# Altium PCB RPI Adapter Board.PcbDoc
Units mm, origin at the board's own origin, x right, y up, seen from the top; angles counter-clockwise.
Board outline 15.01 x 16.01 mm, 2 copper layers (Top Layer, Bottom Layer); 2 components, 4 nets, 12 pads, 0 vias.
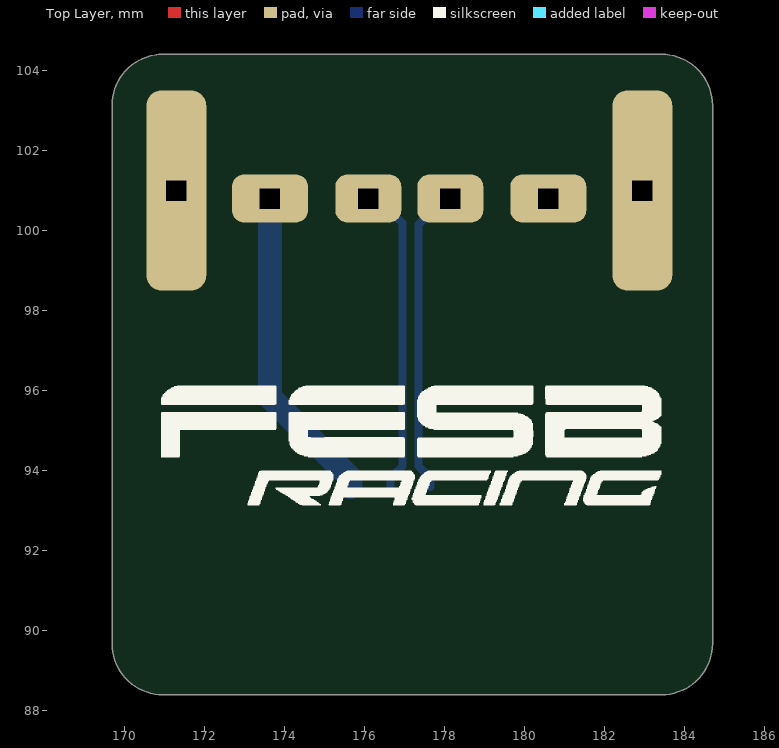
[diagram p0: Top Layer view]
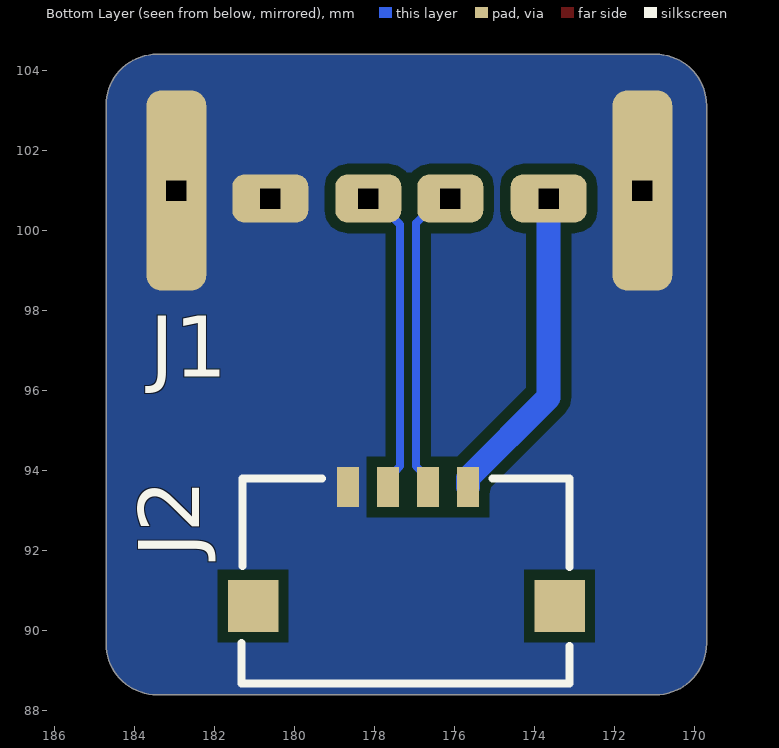
[diagram p1: Bottom Layer view, seen from below]

## Layer stack, top to bottom
Top Solder: solder mask 0.0102, Solder Resist, Dk 3.5
Top Layer: signal copper 0.0356
Dielectric 1: dielectric 0.32, FR-4, Dk 4.8
Bottom Layer: signal copper 0.0356
Bottom Solder: solder mask 0.0102, Solder Resist, Dk 3.5

## Board outline
169.695,89.67 ccw(c170.97,89.67) 170.97,88.395 183.43,88.395 ccw(c183.43,89.67) 184.705,89.67 184.705,103.13 ccw(c183.43,103.13) 183.43,104.405 170.97,104.405 ccw(c170.97,103.13) 169.695,103.13

## Design rules (kind name [scope] priority, off if disabled: settings)
Clearance [All] p1: gap=0.254 ignorepadtopadclearanceinfootprint=TRUE except(0.15: Arc-Arc Arc-Track Arc-Text Track-Track Track-Text SMDPad-SMDPad SMDPad-Text THPad-Text Via-Text Fill-Text Poly-Text Region-Text Text-Text; 0.2: Arc-SMDPad Track-SMDPad; 0.3: Arc-Hole Track-Hole SMDPad-Hole THPad-Hole Via-Hole Fill-Hole Poly-Hole Region-Hole Text-Hole; 0.33: Arc-THPad Track-THPad SMDPad-THPad; 0.5: THPad-THPad)
ComponentClearance [All] p1: gap=0 collisioncheckmode=3 verticalgap=0.254 showdistances=FALSE
DiffPairsRouting [All] p1: maxlimit=0.2 minlimit=0.2 mostfreqgap=0.2 toplayer_minwidth=0.2 toplayer_maxwidth=0.2 toplayer_prefwidth=0.2 bottomlayer_minwidth=0.2 bottomlayer_maxwidth=0.2 bottomlayer_prefwidth=0.2 maxuncoupledlength=12.7
HoleSize [All] p1: absolutevalues=TRUE maxlimit=6.3 minlimit=0.2 maxpercent=80.000 minpercent=20.000
MinimumAnnularRing [All] p1: minimumring=0.2
MinimumSolderMaskSliver [All] p1: minsoldermaskwidth=0
PlaneClearance [All] p1: clearance=0.3
PlaneConnect [All] p1: planeconnectstyle=Direct reliefexpansion=0.508 reliefentries=4 reliefconductorwidth=0.254 reliefairgap=0.254
PolygonConnect [All] p1: connectstyle=Direct reliefconductorwidth=0.254 reliefentries=4 polygonreliefangle="90 Angle" airgapwidth=0.254
RoutingVias [All] p1: holewidth=0.3 width=0.5 viastyle="Through Hole" minholewidth=0.2 minwidth=0.45 maxholewidth=1 maxwidth=0.6
SilkToSilkClearance [All] p1: silktosilkclearance=0.15
SilkToSolderMaskClearance [IsPad] p1: minsilkscreentomaskgap=0.1 clearancetoexposedcopper=TRUE
SolderMaskExpansion [All] p1: expansion=0.102 istentingtop=FALSE
Width [All] p1: maxlimit=10 minlimit=0.2 preferedwidth=0.254
22 further rules are at their usual default settings.

## Classes and differential pairs
differential pair USB: +USB_P -USB_N

## Components (designator, comment, footprint, x,y, rotation, side; value= is the part's Value field where it differs from the comment)
J1 "USB_A 2.0" USB_A_M_TH_V 177.1,101 r180 bottom
J2 "Molex Pico-Lock 1x4" 5037630491 176.544,92.1 r0 bottom

## Footprints (in the part's own frame and the unit in brackets; to place one, negate y for a bottom-side part, rotate by r counter-clockwise, add the part's x,y. Pads: shape width x height; smd on the part's side, far side on the other; paste and mask are expansions set on the pad)
5037630491 [mm]
  rect 0.55x1 smd: 1(-0.887,-1.49) 2(0.113,-1.49) 3(1.113,-1.49) 4(2.113,-1.49)
  rect 1.26x1.3 smd: 5(-3.175,1.49) 5(4.488,1.49)
  silkscreen extent -3.43,-1.7 4.78,3.43, body extent -4.06,-2.16 5.33,3.43, height 1.47
USB_A_M_TH_V [mm]
  rrect50% 1.9x1.2 hole 0.5 square: 1(3.46,-0.2) 4(-3.5,-0.2)
  rrect50% 1.65x1.2 hole 0.5 square: 2(1,-0.2) 3(-1.05,-0.2)
  rrect50% 1.5x5 hole 0.5 square: 5(-5.85,0) 5(5.8,0)
  body extent -7,-2.7 7,2.7, height 22.61

## Part data
J1: library part "Kandens USB_A 2.0", Manufacturer Part Number="AM 15.0", Supplier Part Number=Alibaba, ComponentLinkDescription=Datasheet, ComponentLinkURL=https://sc02.alicdn.com/kf/Hb5bc4045d1a641a4a6ab2afd0a44bb88U/246867406/Hb5bc4045d1a641a4a6ab2afd0a44bb88U.png_.webp, FR_SN=J-23, Part Number="Kandens USB_A 2.0"
J2: Manufacturer Part Number=503763-0491, Supplier Part Number=538-503763-0491, ComponentLinkDescription=Datasheet, ComponentLinkURL=https://hr.mouser.com/datasheet/2/276/2/5037630491_PCB_HEADERS-463683.pdf, FR_SN=J-21, Part Number="Molex Pico-Lock 1x4"

## Nets (pads, with @x,y where several pads share a name; then routed paths per layer and width w, separated by ;. In a path a pad name is that pad's centre, name@x,y a point inside that pad or via, vN(x,y) a via of type N, cw(c..) or ccw(c..) an arc to the next point about the centre after c; other vN are vias at no path point)
NetJ1_1: J1.1 J2.1 | length 8
  Bottom Layer w0.6: J1.1 173.64,95.831 175.656,93.815 J2.1
NetJ1_4: J1.4 J1.5 J2.4
USB_N: J1.2 J2.2 | length 7.7
  Bottom Layer w0.2: J1.2@176.2,100.8 176.339,100.8 176.956,100.183 176.956,94.107 176.839,93.99 176.831,93.99 176.656,93.815 J2.2
USB_P: J1.3 J2.3 | length 7.9
  Bottom Layer w0.2: J2.3 177.656,93.815 177.481,93.99 177.473,93.99 177.356,94.107 177.356,100.149 178.007,100.8 J1.3@178.25,100.8
pads on no net: J2.5

## Polygon pours and split planes (outlines as drawn)
NetJ1_4 on Bottom Layer "Bottom Layer-NetJ1_4" (solid, pour order 0): 169.695,89.67 ccw(c170.97,89.67) 170.97,88.395 183.43,88.395 ccw(c183.43,89.67) 184.705,89.67 184.705,103.13 ccw(c183.43,103.13) 183.43,104.405 170.97,104.405 ccw(c170.97,103.13) 169.695,103.13

## Silkscreen, mask and mechanical layers (free items; w line width, h text height)
Top Overlay:
  drawing of 727 lines, arcs and shapes, not listed
Outline and slots:
  lines w0.01: 169.7,92 169.7,89.67 ; 184.7,93.6 184.7,103.13 ccw(c183.43,103.13) 183.43,104.4 170.97,104.4 ccw(c170.97,103.13) 169.7,103.13 169.7,89.67 ; 184.7,95.13 184.7,89.67 cw(c183.43,89.67) 183.43,88.4 170.97,88.4 cw(c170.97,89.67) 169.7,89.67